# EAGLE board NodeIrTranceiver.v2.cg2 (EAGLE 4.11)
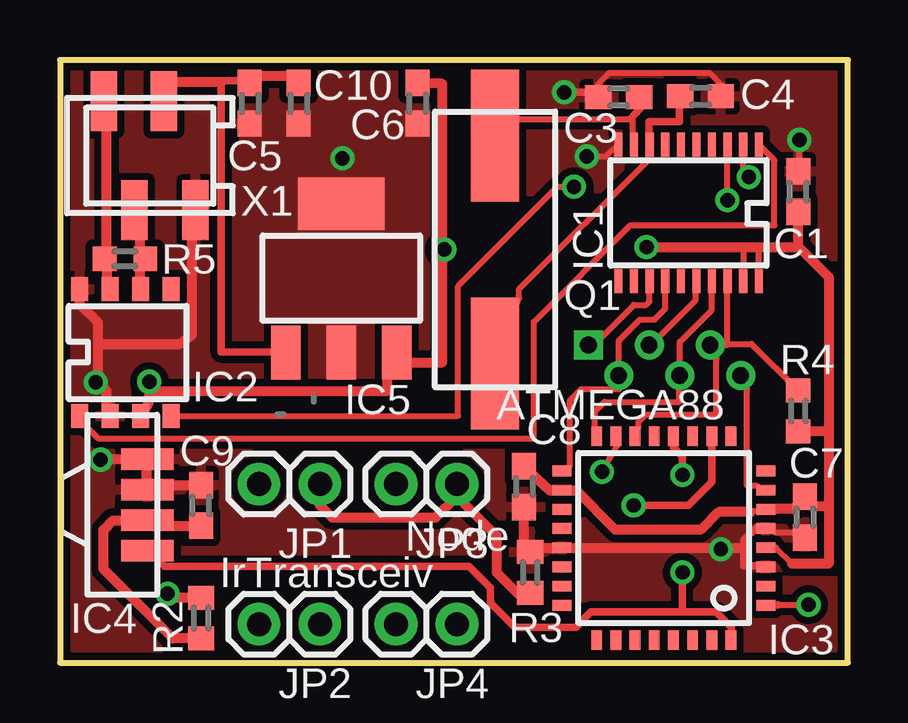
[diagram p0: board, top side]
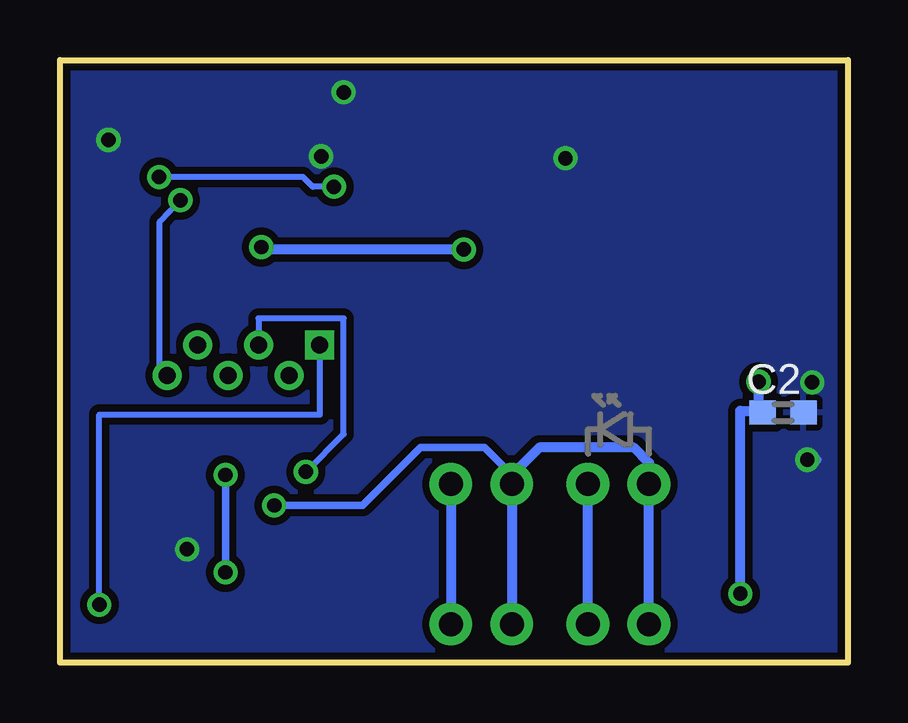
[diagram p1: board, bottom side, seen from below]

Size 32.85 x 25.13 mm. Coordinates in mm from the lower left corner, seen from the top.
Outline: 0,0 32.85,0 32.85,25.13 0,25.13 0,0
Copper layers (1*16): Top 0.035mm / dielectric 1.5mm / Bottom 0.035mm
Design rules "10mils, 0.6drill": minimum track width 10mil, minimum drill 0.6mm, track to track 10mil, track to pad 10mil, pad to pad 10mil, via to via 10mil, smd to smd 10mil, copper to edge 10mil, drill to drill 10mil, minimum pad ring 10mil, minimum via ring 8mil, stop-mask expansion 0mil, vias tented up to drill 0mil, thermal gap 10mil

## Footprints (pad centres in the part's own frame; a part is rotated, then mirrored left to right if it is on the bottom)
C0603 = smd 1.1 x 1: 1 -0.85,0; 2 0.85,0
TSSOP = smd 0.34 x 1: 1 -2.925,-2.85; 2 -2.275,-2.85; 3 -1.625,-2.85; 4 -0.975,-2.85; 5 -0.325,-2.85; 6 0.325,-2.85; 7 0.975,-2.85; 8 1.625,-2.85; 9 2.275,-2.85; 10 2.925,-2.85; 11 2.925,2.85; 12 2.275,2.85; 13 1.625,2.85; 14 0.975,2.85; 15 0.325,2.85; 16 -0.325,2.85; 17 -0.975,2.85; 18 -1.625,2.85; 19 -2.275,2.85; 20 -2.925,2.85
TSSOP' = smd 0.7 x 1: 1 -1.981,-2.645; 2 -0.711,-2.645; 3 0.559,-2.645; 4 1.829,-2.645; 5 1.829,2.645; 6 0.559,2.645; 7 -0.711,2.645; 8 -1.981,2.645
TQFP32 = smd 0.8 x 0.45: 1 -4.25,2.65; 2 -4.25,1.85; 3 -4.25,1.05; 4 -4.25,0.25; 5 -4.25,-0.55; 6 -4.25,-1.35; 7 -4.25,-2.15; 8 -4.25,-2.95; 17 4.25,-2.95; 18 4.25,-2.15; 19 4.25,-1.35; 20 4.25,-0.55; 21 4.25,0.25; 22 4.25,1.05; 23 4.25,1.85; 24 4.25,2.65 | smd 0.45 x 0.8: 9 -2.8,-4.4; 10 -2,-4.4; 11 -1.2,-4.4; 12 -0.4,-4.4; 13 0.4,-4.4; 14 1.2,-4.4; 15 2,-4.4; 16 2.8,-4.4; 25 2.8,4.1; 26 2,4.1; 27 1.2,4.1; 28 0.4,4.1; 29 -0.4,4.1; 30 -1.2,4.1; 31 -2,4.1; 32 -2.8,4.1
SMD = smd 0.9 x 2.2: 1 -1.905,0; 2 -0.635,0; 3 0.635,0; 4 1.905,0
SOT223 = smd 1.219 x 2.235: 1 -2.311,-3.099; 2 0,-3.099; 3 2.311,-3.099 | smd 3.6 x 2.2: 4 0,3.099
1X02 = drill 1 pad 1.778 round: 1 -1.27,0; 2 1.27,0
SMD' = smd 5.5 x 2: P$1 4.75,0; P$2 -4.75,0
R0603@1 = smd 1 x 1.1: 1 -0.85,0; 2 0.85,0
R0603 = smd 0.991 x 1.016: 1 -0.85,0; 2 0.85,0
VIA-LIST = drill 0.7 square: 1 0,2.54 | drill 0.7 round: 2 -1.27,1.27; 3 0,0; 4 -1.27,-1.27; 5 0,-2.54; 6 -1.27,-3.81
MICROMATCH-4-SMD = smd 1.1 x 2.5: 1 1.905,-2.272; 2 0.585,2.272; 3 -0.635,-2.272; 4 -1.905,2.272

## Placement (x,y rotation side)
C1  100n  [C0603]  30.78,19.63 90 top
C2  100n  [C0603]  2.7,10.42 0 bottom
C3  16p  [C0603]  23.29,23.58 180 top
C4  16p  [C0603]  26.7,23.61 0 top
C5  0.22µ  [C0603]  7.92,23.32 270 top
C6  100n  [C0603]  14.9,23.32 270 top
C7  100n  [C0603]  31.04,6.06 270 top
C8  100n  [C0603]  19.34,7.33 270 top
C9  100n  [C0603]  5.88,6.55 90 top
C10  10n/200V  [C0603]  9.95,23.32 270 top
IC1  MCP2515  [TSSOP]  26.21,18.75 180 top
IC2  MCP2551  [TSSOP']  2.8,12.92 0 top
IC3  ATMEGA88  [TQFP32]  25.17,5.04 180 top
IC4  TSOP362XX  [SMD]  3.65,6.58 270 top
IC5  LM340MP-5.0  [SOT223]  11.73,16.03 0 top
JP1  [1X02]  9.57,7.44 180 top
JP2  [1X02]  9.57,1.6 180 top
JP3  [1X02]  15.28,7.44 180 top
JP4  [1X02]  15.28,1.6 180 top
Q1  16/20MHz  [SMD']  18.14,17.23 270 top
R2  100  [R0603@1]  5.88,1.86 270 top
R3  800  [R0603@1]  19.6,3.76 90 top
R4  10k  [R0603]  30.78,10.49 90 top
R5  [R0603]  2.71,16.84 0 top
U$1  CAN-INTERFACE  [VIA-LIST]  24.57,13.24 90 top
X1  MICROMATCH-4  [MICROMATCH-4-SMD]  3.75,21.13 0 top

## Library data of the parts
C1-C10 R2-R5 = rcl
IC1 = mcp2515
IC2 = mcp2551
IC3 = atmega88
IC4 = tsop362xx
IC5 = lm340mp
JP1-JP4 = pinhead-mm
Q1 = hc49-4h-smx
U$1 = can-interface
X1 = micromatch-smd

## Nets
CANH: IC2.7 R5.1 X1.4
CLK: IC1.3 IC3.7 U$1.6
CS: IC1.18 IC3.14 R4.2 U$1.5
GND: C1.2 C2.2 C3.2 C4.2 C5.2 C6.2 C7.2 C8.2 C9.2 C10.2 IC1.10 IC2.2 IC2.8 IC3.3 IC3.5 IC3.21 IC4.1 IC4.2 IC5.2 IC5.4 R3.2 X1.1
INT: IC1.13 IC3.1 U$1.1
IRDIOD: IC3.10 JP1.2 JP2.2 JP3.2 JP4.2
IRMODUL: IC3.12 IC3.32 IC4.4
MISO: IC1.17 IC3.16 U$1.4
MOSI: IC1.16 IC3.15 U$1.3
N$1: IC1.2 IC2.4
N$2: IC1.1 IC2.1
N$3: JP1.1 JP2.1 JP3.1 JP4.1 R3.1
N$5: IC2.6 R5.2 X1.3
N$12: C3.1 IC1.9 Q1.P$2
N$13: C4.1 IC1.8 Q1.P$1
SCK: IC1.14 IC3.17 U$1.2
VCC: C1.1 C2.1 C6.1 C7.1 C8.1 IC1.19 IC1.20 IC2.3 IC3.4 IC3.6 IC3.18 IC5.3 R2.1 R4.1
VCC_ARNE: C5.1 C10.1 IC5.1 X1.2
VDD: C9.1 IC4.3 R2.2

## Tracks (layer width: path | path; a pad name or v marks a point on that pad's centre or on a via)
CANH
  Top 0.254: R5.1 1.95,16.84 1.95,15.57 IC2.7
  Top 0.406: X1.4 1.95,22.79 1.95,16.84 1.95,15.95 2.07,15.83 2.07,15.59 IC2.7
CLK  (via drill 0.6)
  Top 0.254: v27.83,19.28 27.83,21.11 IC1.3 | IC3.7 29.05,7.37 28.64,7.37 28.64,11.41 U$1.6
  Bottom 0.254: v27.83,19.28 28.69,18.39 28.69,12.29 U$1.6
CS
  Top 0.254: IC1.18 27.83,13.24 27.73,13.24 | 27.73,13.24 U$1.5 27.37,12.67 27.37,10.34 24.43,10.34 24.12,10.03 24.12,9.8 IC3.14 | 27.73,13.24 27.73,13.29 28.83,13.29 R4.2
GND  (via drill 0.6)
  Top 0.254: v21.96,21.11 22.77,21.11 IC1.10 | v30.83,21.79 30.83,20.8 C1.2 | 1.59,11.69 v1.49,11.69 | 20.62,4.78 IC3.21 21.28,4.78 | 29.05,4.04 IC3.3 | 29.05,5.64 IC3.5 29.81,5.44 30.57,5.44 C7.2 | 27.27,4.78 v27.55,4.73 | C3.2 22.44,24.13 22.9,24.59 27.09,24.59 27.6,24.08 27.55,23.9 C4.2
  Top 0.305: IC2.2 1.95,10.72 | C3.2 22.15,23.77 v21.02,23.77 | 29.05,4.04 28.51,4.04 28.51,4.78 28.51,5.11 29.05,5.64
  Top 0.406: 1.95,10.72 1.95,11.33 1.59,11.69 1.59,13.29 | 1.59,13.29 1.59,14.17 0.83,14.94 IC2.8 | 19.35,4.78 20.62,4.78 | 19.35,4.78 C8.2 | 21.28,4.78 27.27,4.78 28.51,4.78 | 3.6,7.21 3.6,7.19 | 3.6,7.21 IC4.2 3.62,7.21 3.6,7.19 | 3.6,8.48 IC4.1 | 3.6,8.48 3.6,7.21 | C9.2 3.81,7.4 3.6,7.19 | 3.6,8.48 1.72,8.48 v1.69,8.46 | X1.1 5.5,18.25 5.5,13.67 5,13.29 1.59,13.29 | R3.2 19.47,4.61 19.47,4.78 19.35,4.78
  Bottom 0.305: v21.02,23.77 20.97,23.85
  Bottom 0.406: v1.69,8.46 1.31,8.46
  other vias: 11.78,21.03
  pour Bottom (isolate 0.305): -0.01,25.15 32.83,25.15 32.83,-0.03 24.38,-0.03 -0.01,-0.03
  pour Top (isolate 0.305, no thermals): 7.71,24.53 15.77,24.53 15.77,11.47 7.71,11.47
  pour Top (isolate 0.305): -0.21,25.22 33.06,25.22 33.06,-0.18 -0.21,-0.18
INT  (via drill 0.6)
  Top 0.254: U$1.1 22.25,13.24 23.92,14.91 24.43,14.91 24.58,15.06 24.58,15.77 24.58,15.78 IC1.13 | 29.94,2.41 v31.21,2.41
  Top 0.305: IC3.1 29.94,2.41
  Bottom 0.254: v31.21,2.41 31.21,10.34 22.01,10.34 22.01,13.16 22.02,13.17 U$1.1
IRDIOD  (via drill 0.6)
  Top 0.305: IC3.10 27.17,7.52 26.2,6.55 v23.92,6.55
  Bottom 0.305: v23.92,6.55 20.23,6.55 17.82,8.97 15.15,8.97 14.01,7.82
  Bottom 0.406: JP2.2 JP1.2 8.3,8.33 8.93,8.97 12.87,8.97 14.01,7.82 JP3.2 JP4.2
IRMODUL  (via drill 0.6)
  Top 0.305: 25.95,2.11 22.14,2.11 21.5,1.47 18.96,1.47 17.95,2.49 17.95,3.12 17.06,4.01 4.36,4.01 3.7,4.67 IC4.4 | IC3.32 27.97,0.96 27.98,0.97 27.98,1.47 27.35,2.11 25.95,2.11 | 25.95,2.11 v25.95,3.76 | IC3.12 25.57,9.35 25.57,8.97 25.95,8.59 v25.95,7.82
  Bottom 0.305: v25.95,3.76 v25.95,7.82
MISO
  Top 0.254: IC1.17 27.18,15.84 27.17,15.83 27.17,14.71 25.84,13.37 U$1.4 25.84,11.9 25.82,10.87 22.7,10.87 22.29,10.47 22.29,9.75 IC3.16
MOSI  (via drill 0.6)
  Top 0.254: U$1.3 24.64,13.24 26.51,15.11 26.51,15.88 IC1.16 | v22.6,7.95 23.23,9.04 IC3.15
  Bottom 0.254: v22.6,7.95 21.02,9.53 21.02,14.35 24.58,14.35 24.58,13.84 U$1.3
N$1  (via drill 0.6)
  Top 0.254: v21.43,19.84 20.74,19.84 16.6,15.7 16.6,10.29 4.94,10.29 IC2.4 | v28.72,20.24 28.49,20.47 IC1.2
  Bottom 0.254: v21.43,19.84 22.32,19.84 22.72,20.24 v28.72,20.24
N$2
  Top 0.254: IC2.1 1.13,9.8 1.59,9.35 19.75,9.35 19.75,14.2 23.79,18.24 29.79,18.24 29.79,20.95 IC1.1
N$3
  Top 0.406: JP1.1 10.84,6.55 11.34,6.05 15.66,6.05 16.55,6.94 | R3.1 19.31,2.87 19.09,2.87 18.2,3.76 18.2,5.28 16.55,6.94 | 16.55,6.94 JP3.1
  Bottom 0.406: JP2.1 JP1.1 | JP3.1 JP4.1
N$5
  Top 0.254: 3.34,16.71 3.34,16.84 R5.2
  Top 0.406: IC2.6 3.34,15.57 3.34,16.71 3.34,17.99 X1.3
N$12
  Top 0.254: IC1.9 23.87,22.07 23.87,22.66 23.79,22.66 19.14,22.66 Q1.P$2
  Top 0.305: C3.1 24.17,23.1 23.79,22.66
N$13
  Top 0.254: IC1.8 24.53,21.11 24.53,20.96 19.14,15.57 19.14,15.19 Q1.P$1
  Top 0.305: IC1.8 24.55,21.6 24.55,21.92 24.55,22.56 25.82,22.56 25.82,23.61 C4.1
SCK
  Top 0.254: IC1.14 25.23,15.87 25.19,15.83 25.24,15.77 25.24,14.76 24.78,14.3 24.17,14.3 23.29,13.42 U$1.2 23.29,11.9 23.31,11.41 21.73,11.41 21.25,10.92 21.25,8.18 IC3.17
VCC  (via drill 0.6)
  Top 0.254: 29.12,15.8 29.15,15.88 IC1.20 29.12,17.32 29.68,17.32 | 3.73,11.25 3.78,11.33 | 29.81,6.4 IC3.6 28.79,6.27 | 21.4,7.16 IC3.18 | IC3.4 29.85,4.79 30.52,4.12 | IC1.19 28.48,15.83 28.49,15.83 28.49,17.32
  Top 0.305: 13.66,12.09 IC5.3
  Top 0.406: C6.1 15.95,24.13 15.95,17.22 | 15.95,17.22 15.95,12.51 14.08,12.51 14.08,13.21 IC5.3 | 3.78,11.33 13.66,11.33 13.66,12.09 | IC2.3 3.67,10.77 3.73,11.25 v3.73,11.71 | 15.95,17.22 v16.02,17.22 | v24.45,17.32 28.49,17.32 29.68,17.32 | 29.68,17.32 | IC3.18 20.69,7.16 20.44,7.16 C8.1 19.35,8.2 | 30.52,4.12 32.05,4.12 32.05,6.5 | 32.05,6.5 31.41,6.5 C7.1 30.57,6.4 29.81,6.4 | 21.4,7.16 21.5,7.19 23.16,5.54 26.71,5.54 27.45,6.27 28.79,6.27 | 32.05,9.6 32.05,6.5 | R2.1 4.53,2.7 v4.49,2.87 | 29.68,17.32 30.78,17.32 30.78,17.35 | 30.78,17.35 C1.1 | R4.1 32.05,9.64 32.05,9.6 | 32.05,9.6 32.05,16.08 30.78,17.35
  Bottom 0.254: C2.1 3.73,10.92
  Bottom 0.406: 3.73,10.92 v3.73,11.71 | v24.45,17.32 24.4,17.32 24.3,17.22 v16.02,17.22 | v4.49,2.87 4.49,10.49 3.73,10.49 3.73,10.42 C2.1 3.54,10.42
VCC_ARNE
  Top 0.305: C5.1 7.84,24.26 6.72,24.26 6.72,24.21 6.72,12.95 9.44,12.95 | 9.44,12.95 9.44,12.93 IC5.1 | 9.44,12.95 9.44,13.03
  Top 0.406: C10.1 9.95,24.46 7.92,24.46 C5.1 | X1.2 4.63,24.21 6.72,24.21
VDD
  Top 0.406: C9.1 3.94,5.7 3.7,5.94 IC4.3 3.62,5.94 3.6,5.92 2.2,5.92 1.82,5.54 1.82,3.89 4.7,1.01 R2.2

## Text on the board
tNames: Node | IrTransceiv